# Altium PCB CargadorDeBaterias.PcbDoc
Units mm, origin at the board's own origin, x right, y up, seen from the top; angles counter-clockwise.
Board outline 50 x 100 mm, 2 copper layers (Top Layer, Bottom Layer); 28 components, 23 nets, 81 pads, 11 vias.
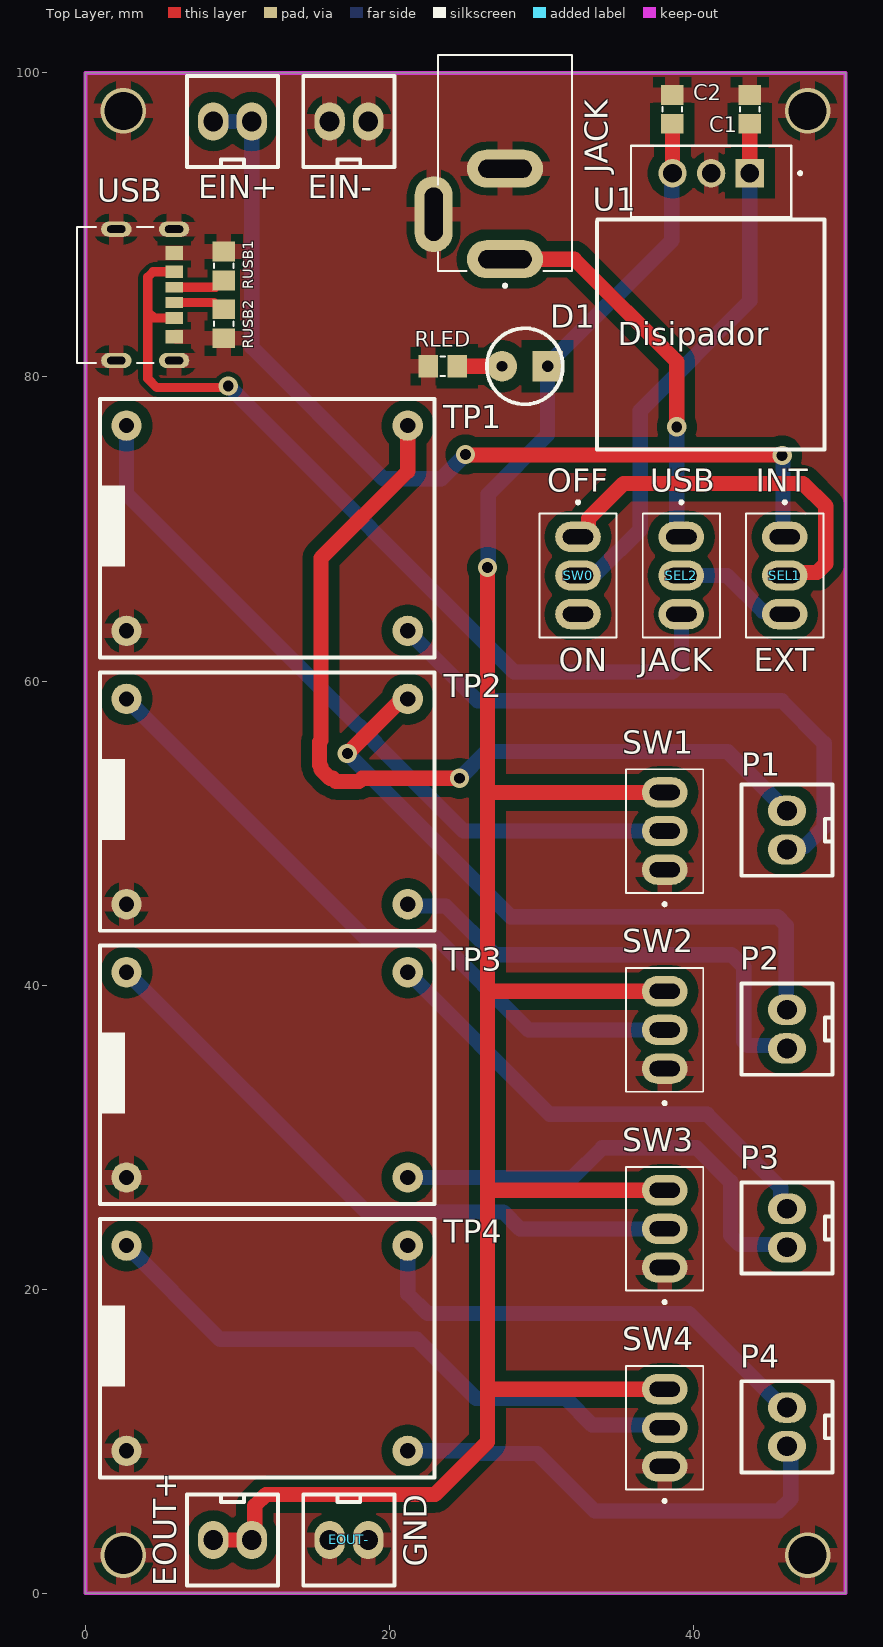
[diagram p0: Top Layer view]
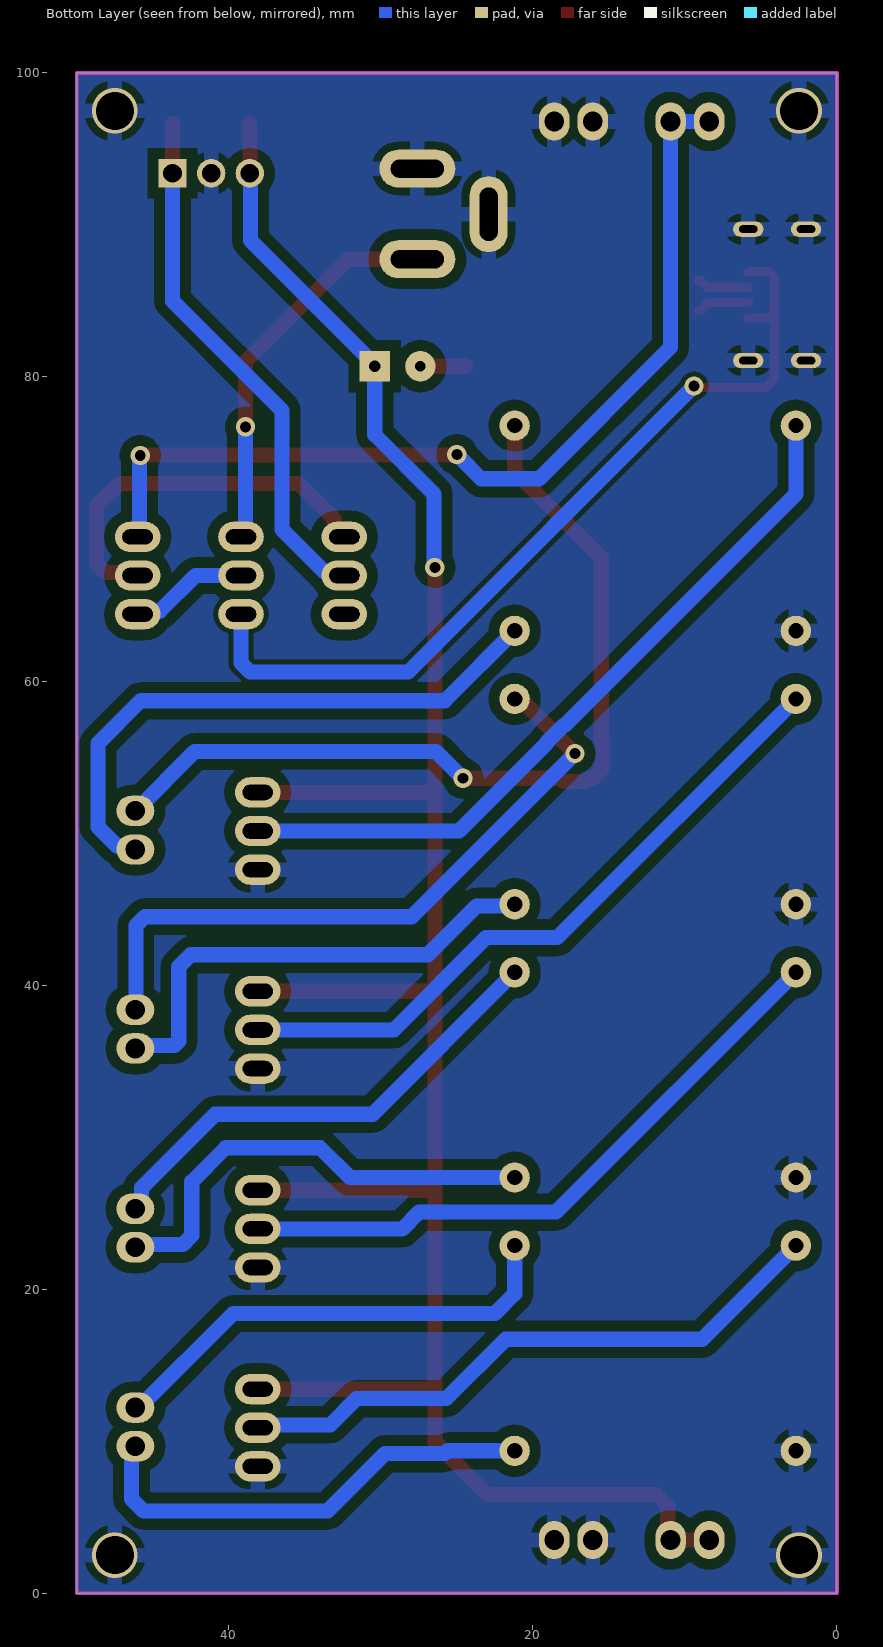
[diagram p1: Bottom Layer view, seen from below]
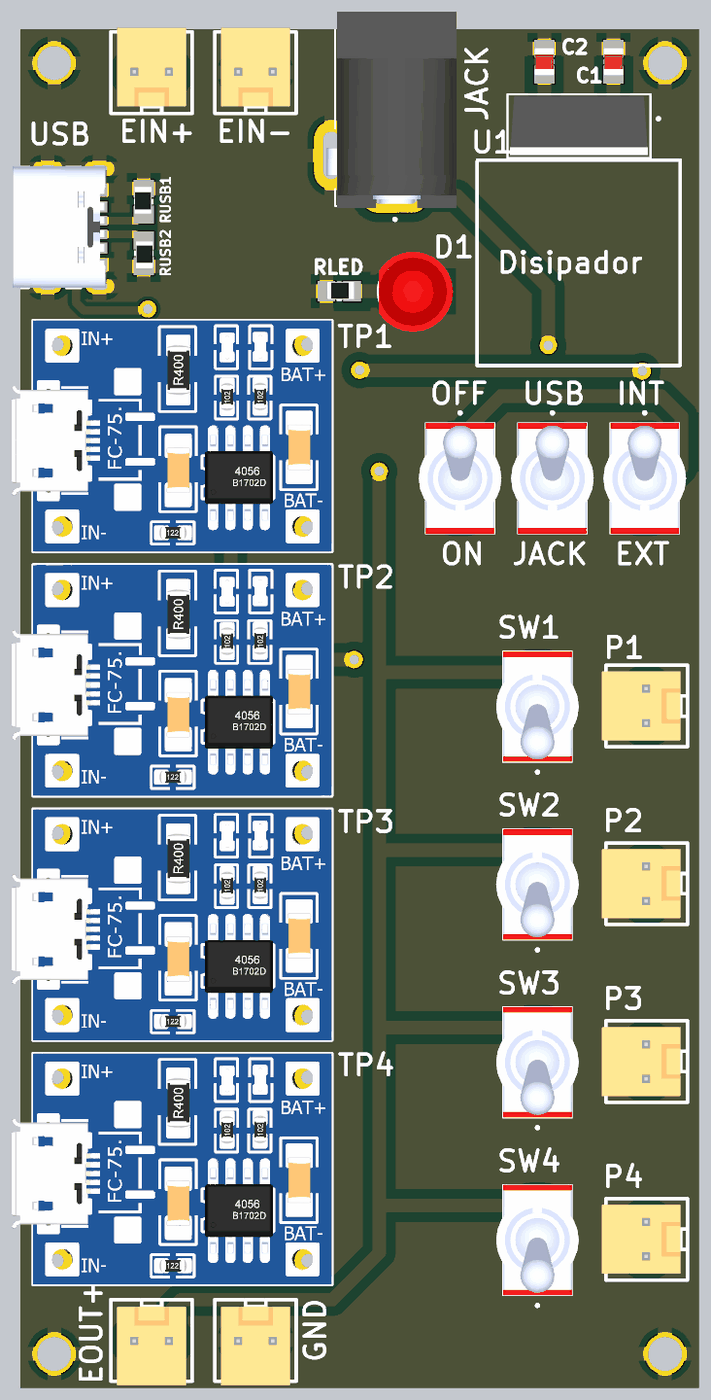
[diagram p2: 3D render of the assembled board from above, using the file's embedded part models]

## Layer stack, top to bottom
Top Solder: solder mask 0.0102, Solder Resist, Dk 3.5
Top Layer: signal copper 0.0356
Dielectric 1: dielectric 0.32, FR-4, Dk 4.8
Bottom Layer: signal copper 0.0356
Bottom Solder: solder mask 0.0102, Solder Resist, Dk 3.5

## Board outline
0,0 50,0 50,100 0,100

## Design rules (kind name [scope] priority, off if disabled: settings)
Clearance Clearance_1 [InNet('NetRUSB1_1')] p1: gap=0.3 ignorepadtopadclearanceinfootprint=TRUE
Clearance Clearance_2 [InNet('NetRUSB2_1')] p2: gap=0.3 ignorepadtopadclearanceinfootprint=TRUE
Clearance Clearance_3 [InNet('VUSB')] p3: gap=0.3 ignorepadtopadclearanceinfootprint=TRUE
Clearance [All] p4: gap=0.7 ignorepadtopadclearanceinfootprint=TRUE
PlaneClearance [All] p1: clearance=1
PolygonConnect [All] p1: connectstyle=Relief reliefconductorwidth=1 reliefentries=4 polygonreliefangle="90 Angle" airgapwidth=0.5
RoutingVias [All] p1: holewidth=0.711 width=1.27 viastyle="Through Hole" minholewidth=0.711 minwidth=1.27 maxholewidth=0.711 maxwidth=1.27
SolderMaskExpansion [All] p1: expansion=0.102 istentingtop=FALSE
Width VUSB [InNet('VUSB') And OnLayer('Top Layer')] p1: maxlimit=1 minlimit=0.254 preferedwidth=0.6
Width J1 [InNet('NetRUSB2_1')] p2: maxlimit=1 minlimit=0.254 preferedwidth=0.6
Width J1_1 [InNet('NetRUSB1_1')] p3: maxlimit=1 minlimit=0.254 preferedwidth=0.6
Width [All] p4: maxlimit=1 minlimit=1 preferedwidth=1
29 further rules are at their usual default settings.

## Components (designator, comment, footprint, x,y, rotation, side; value= is the part's Value field where it differs from the comment)
C1 "0805 100nF Capacitor" "CAP 0805" 43.7,97.6 r270 top value=100nF
C2 "0805 100nF Capacitor" "CAP 0805" 38.6,97.6 r270 top value=100nF
D1 "LED" LED 28.9,80.7 r180 top
EIN+ "IN +" "HEADER x2" 12.674,99.8 r180 top
EIN- "IN -" "HEADER x2" 20.33,99.8 r180 top
EOUT+ "OUT +" "HEADER x2" 6.674,0.5 r0 top
EOUT- "OUT -" "HEADER x2" 14.33,0.5 r0 top
JACK "JACK 5MM" "JACK 5MM" 27.6,90.45 r180 top
P1 "" "HEADER x2" 43.15,53.19 r270 top
P2 "" "HEADER x2" 43.15,40.106 r270 top
P3 "" "HEADER x2" 43.15,27.022 r270 top
P4 "" "HEADER x2" 43.15,13.938 r270 top
RLED "220ohm 0805 resistor" "RES 0805" 23.5,80.7 r0 top value=3KΩ
RUSB1 "5,1Kohm 0805 resistor" "RES 0805" 9.1,87.3 r90 top value=3KΩ
RUSB2 "5,1Kohm 0805 resistor" "RES 0805" 9.1,83.5 r270 top value=3KΩ
SEL1 "" "SWITCH PALANCA" 46,66.94 r270 top
SEL2 "" "SWITCH PALANCA" 39.2,66.94 r270 top
SW0 "SLIDE SWITCH" "SWITCH PALANCA" 32.4,66.94 r270 top
SW1 "" "SWITCH PALANCA" 38.1,50.133 r90 top
SW2 "" "SWITCH PALANCA" 38.1,37.049 r90 top
SW3 "" "SWITCH PALANCA" 38.1,23.965 r90 top
SW4 "" "SWITCH PALANCA" 38.1,10.881 r90 top
TP1 "TP 4056" "TP 4056" 0.95,61.55 r0 top
TP2 "TP 4056" "TP 4056" 0.95,43.571 r0 top
TP3 "TP 4056" "TP 4056" 0.95,25.593 r0 top
TP4 "TP 4056" "TP 4056" 0.95,7.614 r0 top
U1 "LM7805" TO220 43.7,93.4 r180 top
USB "USB-C" USB-C 5.833,85.4 r270 top

## Footprints (in the part's own frame and the unit in brackets; to place one, negate y for a bottom-side part, rotate by r counter-clockwise, add the part's x,y. Pads: shape width x height; smd on the part's side, far side on the other; paste and mask are expansions set on the pad)
"CAP 0805" [mm]
  rect 1.3x1.5 smd: 1(-0.95,0) 2(0.95,0)
  silkscreen extent -0.15,-0.65 0.15,0.65, body extent -1,-0.72 1,0.72, height 1.23
"HEADER x2" [mm]
  oval 2x2.5 hole 1.3: +(1.73,3) -(4.27,3)
  silkscreen extent 0,0 6,6, body extent 0.46,-0.31 5.54,5.49, height 11.19
"JACK 5MM" [mm]
  oval 5x2.5 hole 1.2 slot 3.5 at 0 deg: 1(0,2.705) 2(0,-3.25)
  oval 2.5x5 hole 1.2 slot 3.5 at 90 deg: 3(4.69,-0.254)
  silkscreen extent -4.4,-10.74 4.4,4.55, body extent -4.53,-10.81 5.02,3.61, height 11.15
LED [mm]
  rect 2x2 hole 0.762: 0(-1.5,0)
  round 2 hole 0.7: 1(1.5,0)
  silkscreen extent -2.5,-2.5 2.5,2.5, body extent -2.98,-2.92 2.47,2.98, height 9.6
"RES 0805" [mm]
  rect 1.3x1.5 smd: 1(-0.95,0) 2(0.95,0)
  silkscreen extent -0.15,-0.65 0.15,0.65, body extent -0.89,-0.57 1.11,0.68, height 0.53
"SWITCH PALANCA" [mm]
  oval 2x3 hole 1 slot 2 at 90 deg: 1(-2.54,0) 2(0,0) 3(2.54,0)
  silkscreen extent -4.91,-2.54 4.07,2.54, body extent -4.07,-3.05 4.06,3.05, height 19.55
TO220 [mm]
  rect 1.86x1.86 / inner round 1.86 / far side rect 1.86x1.86 hole 1.24: 1(0,0)
  round 1.86 hole 1.24: 2(2.54,0) 3(5.08,0)
  silkscreen extent -3.41,-1.8 7.81,2.9, body extent -2.54,-1.68 7.62,2.67, height 20.4
"TP 4056" [mm]
  round 2 hole 1: 0(1.75,15.25) 1(1.75,1.75) 2(20.25,15.25) 3(20.25,1.75)
  silkscreen extent 0,0 22,17, body extent -1.58,0 22,17, height 3.72
USB-C [mm]
  rect 0.7x1.15 smd: A5(-0.5,0.005) B5(0.5,0.005)
  rect 0.8x1.15 smd: A9(1.52,0.005) B9(-1.52,0.005)
  rect 0.9x1.15 smd: A12(2.75,0.005) B12(-2.75,0.005)
  oval 1x2 hole 0.5 slot 1.2 at 90 deg: S1(-4.32,0) S2(4.32,0) S3(-4.32,-3.8) S4(4.32,-3.8)
  silkscreen extent -4.47,-6.4 4.47,-1.35, body extent -4.5,-6.37 4.45,0.53, height 3.26

## Part data
C1 C2: library part Cap, "Capacitor", LatestRevisionDate=17-Jul-2002, LatestRevisionNote="Re-released for DXP Platform.", PackageDescription="Radial Cap, Thru-Hole; 2 Leads; 0.3 in Pin Spacing", PackageReference=RAD-0.3, Published=8-Jun-2000, Publisher="Altium Limited"
EIN+ EIN- EOUT+ EOUT- P1 P2 P3 P4: library part "HEADER X2", LatestRevisionDate=17-Jul-2002, LatestRevisionNote="Re-released for DXP Platform.", Publisher="Altium Limited"
JACK: Package="Non-Standard MPD", Availability=Unavailable, MF=MPD, MP=EJ508A, Price=None, SnapEDA_Link=https://www.snapeda.com/parts/EJ508A/MPD%20%28Memory%20Protection%20Devices%29/view-part/474399/?ref=snap
RLED RUSB1 RUSB2: library part "RESISTOR 1/4W", LatestRevisionDate=17-Jul-2002, LatestRevisionNote="Re-released for DXP Platform.", PackageDescription="Axial Device, Thru-Hole; 2 Leads; 0.3 in Pin Spacing", PackageReference=AXIAL-0.3, Published=8-Jun-2000, Publisher="Altium Limited"
SEL1 SEL2 SW1 SW2 SW3 SW4: library part "Header 3", LatestRevisionDate=17-Jul-2002, LatestRevisionNote="Re-released for DXP Platform.", Publisher="Altium Limited"
U1: Package="TO-220-3 ON Semiconductor", Availability="In Stock", Check_prices=https://www.snapeda.com/parts/LM7805CT/Onsemi/view-part/?ref=eda, MF="ON Semiconductor", MP=LM7805CT, Price=None, Purchase-URL=https://pricing.snapeda.com/search/part/LM7805CT/?ref=eda, SnapEDA_Link=https://www.snapeda.com/parts/LM7805CT/Onsemi/view-part/?ref=snap
USB: "Type C, 3 A, Right Angle, Surface Mount (SMT), Power-Only USB Receptacle", Package=None, Availability=Unavailable, MP=UJC-HP-3-SMT-TR, Price=None
D1: LatestRevisionDate=08-Jul-2005, LatestRevisionNote="Mech Layer 1 removed.", PackageDescription="LED; 2 Leads", PackageReference=LED-0, Published=8-Jun-2000, Publisher="Altium Limited"
SW0: LatestRevisionDate=17-Jul-2002, LatestRevisionNote="Re-released for DXP Platform.", Publisher="Altium Limited"

## Via types
v1: diameter 1.27, hole 0.711, Top Layer to Bottom Layer, 7 vias
v2: diameter 3, hole 2.5, Top Layer to Bottom Layer, 4 vias

## Nets (pads, with @x,y where several pads share a name; then routed paths per layer and width w, separated by ;. In a path a pad name is that pad's centre, name@x,y a point inside that pad or via, vN(x,y) a via of type N, cw(c..) or ccw(c..) an arc to the next point about the centre after c; other vN are vias at no path point)
GND: C1.1 C2.1 EIN-.+ EIN-.- EOUT-.+ EOUT-.- JACK.2 JACK.3 RLED.1 RUSB1.2 RUSB2.2 SW1.1 SW2.1 SW3.1 SW4.1 TP1.1 TP2.1 TP3.1 TP4.1 U1.2 USB.A12 USB.B12 USB.S1 USB.S2 USB.S3 USB.S4
  other v2: 2.5,2.5 47.5,2.5 2.5,97.5 47.5,97.5
NetC1_2: C1.2 SW0.2 U1.1 | length 35
  Top Layer w1: U1.1 C1.2
  Bottom Layer w1: SW0.2 32.591,67.131 33.663,67.131 36.5,69.969 36.5,77.8 43.7,85 U1.1
NetD1_1: D1.1 RLED.2 | length 3
  Top Layer w1: RLED.2 D1.1
NetP1_+: P1.+ TP1.2 | length 58.5
  Top Layer w1: TP1.2 21.2,73.8 15.5,68.1 15.5,56.095 15.396,55.991 15.396,54.471 15.5,54.368 15.5,54.186 16.086,53.6 16.268,53.6 16.471,53.396 17.992,53.396 18.195,53.6 v1(24.6,53.6)
  Bottom Layer w1: v1(24.6,53.6) 26.364,55.364 42.246,55.364 P1.+
NetP1_-: P1.- TP1.3 | length 39
  Bottom Layer w1: TP1.3 25.8,58.7 45.8,58.7 48.6,55.9 48.6,50.4 47.311,49.111 46.341,49.111 P1.-
NetP2_+: P2.+ TP2.2 | length 44.6
  Top Layer w1: v1(17.231,55.231) 20.821,58.821 TP2.2
  Bottom Layer w1: v1(17.231,55.231) 27.963,44.5 45.514,44.5 46.1,43.914 46.1,38.426 P2.+
NetP2_-: P2.- TP2.3 | length 31.8
  Bottom Layer w1: TP2.3 21.321,45.2 23.7,45.2 26.9,42 42.5,42 43.3,41.2 43.3,36.286 43.558,36.027 45.959,36.027 P2.-
NetP3_+: P3.+ TP3.2 | length 32
  Bottom Layer w1: TP3.2 30.543,31.5 40.9,31.5 45.736,26.664 45.736,25.706 P3.+
NetP3_-: P3.- TP3.3 | length 30.5
  Bottom Layer w1: TP3.3 32.043,27.343 34,29.3 40.2,29.3 42.441,27.059 42.441,23.529 43.026,22.943 45.959,22.943 P3.-
NetP4_+: P4.+ TP4.2 | length 31.2
  Bottom Layer w1: TP4.2 21.2,19.7 22.5,18.4 39.708,18.4 45.9,12.208 P4.+
NetP4_-: P4.- TP4.3 | length 30.7
  Bottom Layer w1: TP4.3 25.599,9.364 25.782,9.181 29.719,9.181 33.5,5.4 45.6,5.4 46.4,6.2 46.4,9.418 P4.-
NetRUSB1_1: RUSB1.1 USB.A5 | length 3.4
  Top Layer w0.6: USB.A5 8.55,85.9 9,86.35 RUSB1.1
NetRUSB2_1: RUSB2.1 USB.B5 | length 3.5
  Top Layer w0.6: USB.B5 8.45,84.9 9,84.35 RUSB2.1@9.1,84.35
NetSEL1_2: SEL1.2 SW0.1 | length 25.6
  Top Layer w1: SW0.1 32.629,69.48 33.091,69.942 33.091,70.691 35.4,73 47.2,73 48.7,71.5 48.7,67.717 48.114,67.131 46.191,67.131 SEL1.2
NetSEL1_3: SEL1.3 SEL2.2 | length 7.9
  Bottom Layer w1: SEL2.2 42.2,66.94 44.549,64.591 45.809,64.591 SEL1.3
V1: SW1.2 TP1.0 | length 49.1
  Bottom Layer w1: TP1.0 2.7,72.3 17.934,57.066 17.992,57.066 19.066,55.991 19.066,55.934 24.867,50.133 SW1.2
V2: SW2.2 TP2.0 | length 44.4
  Bottom Layer w1: TP2.0 18.4,43.121 23.079,43.121 29.151,37.049 SW2.2
V3: SW3.2 TP3.0 | length 42.4
  Bottom Layer w1: TP3.0 18.479,25.064 27.49,25.064 28.589,23.965 SW3.2
V4: SW4.2 TP4.0 | length 40.4
  Bottom Layer w1: TP4.0 8.864,16.7 21.8,16.7 25.7,12.8 31.6,12.8 33.327,11.073 37.909,11.073 SW4.2
VCC: C2.2 D1.0 EOUT+.+ EOUT+.- SW1.3 SW2.3 SW3.3 SW4.3 U1.3 | length 160.5
  Top Layer w1: EOUT+.+ EOUT+.- 11.136,3.691 11.136,5.75 11.886,6.5 23,6.5 26.448,9.948 26.448,13.1 ; v1(26.448,67.468) 26.448,52.8 ; SW4.3 26.77,13.421 26.448,13.1 ; SW3.3 26.543,26.505 26.448,26.6 ; SW2.3 26.538,39.589 26.448,39.5 ; SW1.3 26.575,52.673 26.448,52.8 ; C2.2 38.61,96.64 38.61,93.41 U1.3 ; 26.448,13.1 26.448,26.6 ; 26.448,26.6 26.448,39.5 ; 26.448,39.5 26.448,52.8
  Bottom Layer w1: v1(26.448,67.468) 26.5,67.52 26.5,72.3 30.4,76.2 D1.0 30.9,81.2 30.9,81.3 38.57,88.97 38.57,93.35 U1.3
VHDR: EIN+.+ EIN+.- SEL1.1 | length 62
  Top Layer w1: v1(25,74.9) 25.033,74.868 45.795,74.868 v1(45.827,74.835)
  Bottom Layer w1: EIN+.- EIN+.+ 10.944,81.956 19.6,73.3 23.4,73.3 v1(25,74.9) ; v1(45.827,74.835) 45.879,74.783 45.879,69.601 SEL1.1
VJACK: JACK.1 SEL2.1 | length 25.7
  Top Layer w1: JACK.1 32.155,87.745 38.9,81 v1(38.9,76.715)
  Bottom Layer w1: v1(38.9,76.715) 38.9,69.78 SEL2.1
VUSB: SEL2.3 USB.A9 USB.B9 | length 57.1
  Top Layer w0.6: USB.A9 4.52,83.88 4.1,84.3 ; USB.B9 4.451,86.92 4.1,86.569 4.1,84.3 ; v1(9.4,79.4) 9.3,79.3 4.7,79.3 4.1,79.9 4.1,84.3
  Bottom Layer w1: v1(9.4,79.4) 28.2,60.6 38.614,60.6 39.2,61.186 SEL2.3
pads on no net: SW0.3

## Polygon pours and split planes (outlines as drawn)
GND on Bottom Layer "GND_L02_P000" (solid, pour order 0): 0,100.1 0.021,100.079 50,100.079 50,0.079 0,0.079
GND on Top Layer "GND_L01_P001" (solid, pour order 1): 0,100.079 49.979,100.079 50,100.1 50,0 0.1,0 0,0.1

## Keep-outs
Keep-Out Layer:
  the board outline again, w0.254

## Silkscreen, mask and mechanical layers (free items; w line width, h text height)
Top Overlay:
  lines w0.254: 33.646,90.238 33.646,75.238 48.621,75.238 48.621,90.361 33.683,90.361
  text "Disipador" at 35,82.1 h1.52
  text "OFF" at 30.369,72.454 h1.52
  text "USB" at 37.169,72.454 h1.52
  text "INT" at 44.096,72.454 h1.52
  text "ON" at 31.131,60.654 h1.52
  text "JACK" at 36.407,60.654 h1.52
  text "EXT" at 43.969,60.654 h1.52
  text "GND" at 22.446,1.754 h1.52 r90